# EAGLE board mpg-200-prototype_v2-with-logo (EAGLE 6.2)
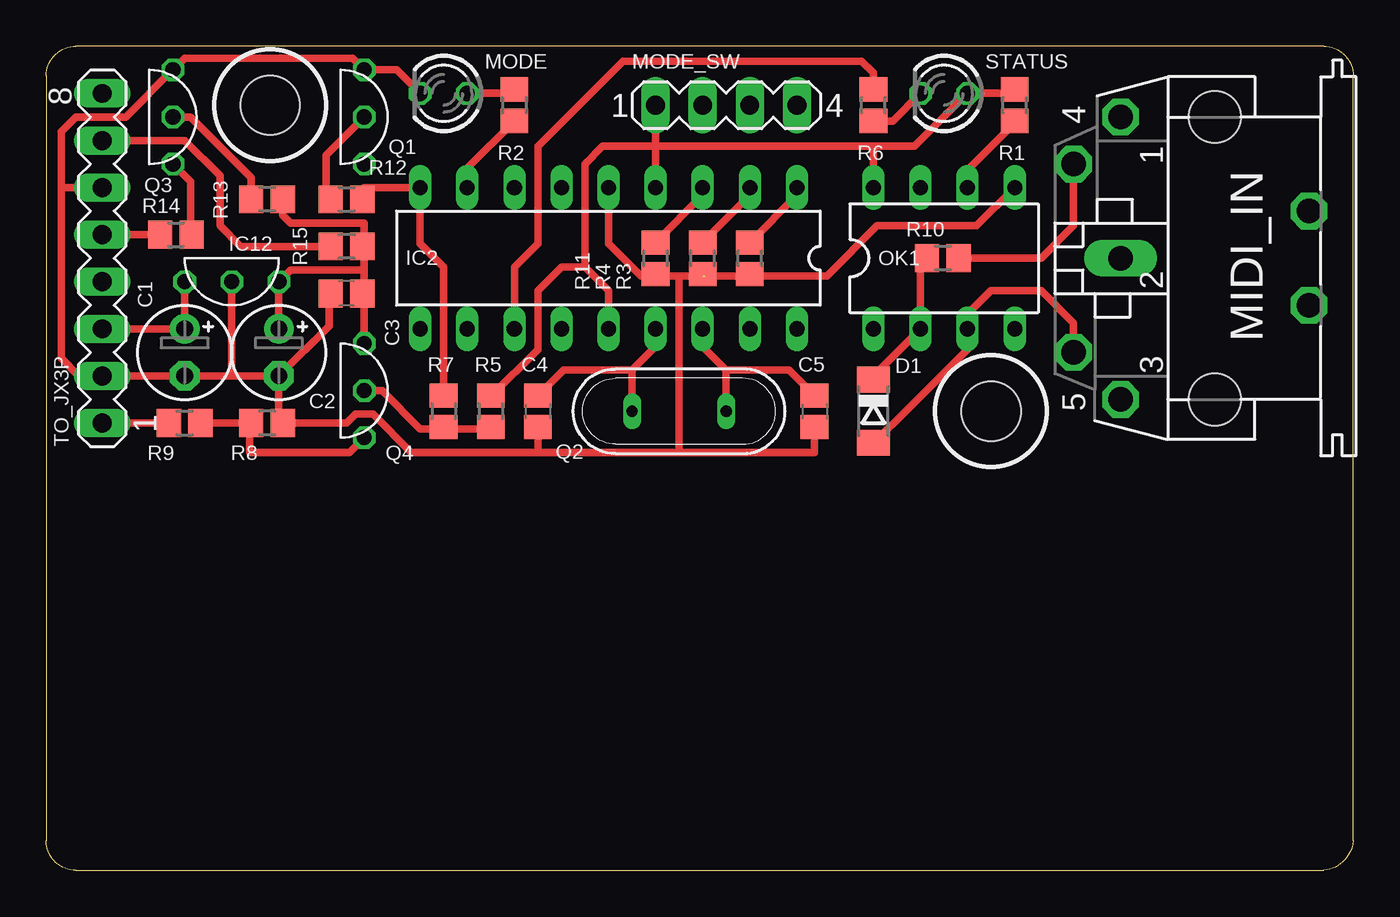
[diagram p0: board, top side]
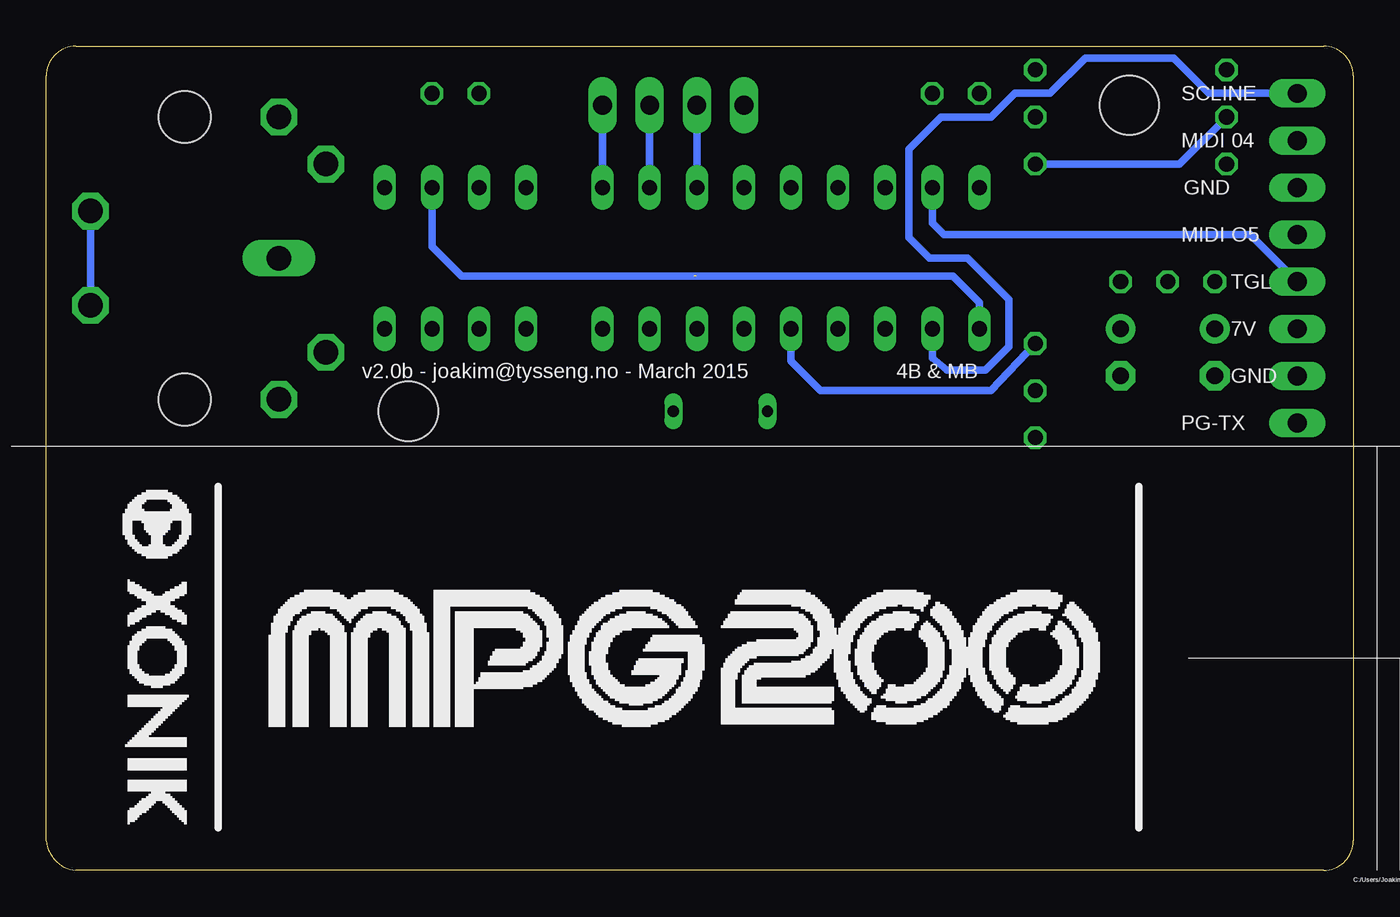
[diagram p1: board, bottom side, seen from below]

Size 70.48 x 44.45 mm. Coordinates in mm from the lower left corner, seen from the top.
Outline: 1.59,0 68.9,0 arc80 70.48,1.59 70.48,42.86 arc90 68.9,44.45 1.59,44.45 arc90 0,42.86 0,1.59 arc90 1.59,0
Copper layers (1*16): Top 0.0356mm / dielectric 1.5011mm / Bottom 0.0356mm
Design rules: minimum track width 6mil, minimum drill 13mil, track to track 6mil, track to pad 6mil, pad to pad 6mil, via to via 6mil, smd to smd 6mil, copper to edge 15mil, drill to drill 6mil, minimum pad ring 7mil, minimum via ring 7mil, stop-mask expansion 3mil, vias tented up to drill 0mil, thermal gap 10mil
Holes 3.2 mm at 50.96,24.77 12.06,41.27

## Footprints (pad centres in the part's own frame; a part is rotated, then mirrored left to right if it is on the bottom)
E2,5-5 = drill 0.9 pad 1.6: + -1.27,0 | drill 0.9 pad 1.6 octagon: - 1.27,0
C0805 = smd 1.3 x 1.5: 1 -0.85,0; 2 0.85,0
SOD80C = smd 1.4 x 1.8: A 1.7,0; C -1.7,0
DIL18 = drill 0.813 long: 1 -10.16,-3.81; 2 -7.62,-3.81; 3 -5.08,-3.81; 4 -2.54,-3.81; 5 0,-3.81; 6 2.54,-3.81; 7 5.08,-3.81; 8 7.62,-3.81; 9 10.16,-3.81; 10 10.16,3.81; 11 7.62,3.81; 12 5.08,3.81; 13 2.54,3.81; 14 0,3.81; 15 -2.54,3.81; 16 -5.08,3.81; 17 -7.62,3.81; 18 -10.16,3.81
TO92 = drill 0.813 octagon: 1 -2.54,0; 2 0,0; 3 2.54,0
MAB5SH = drill 1.321 octagon: 1 7.62,5.08; 3 -7.62,5.08; 4 5.08,7.62; 5 -5.08,7.62; PE -2.54,-5.08; PE@ 2.54,-5.08 | drill 1.321 long: 2 0,5.08 | hole 2.794: 7.62,0; -7.62,0
LED3MM = drill 0.813 octagon: A -1.27,0; K 1.27,0
MA04-1 = drill 1.016 long: 1 -3.81,0; 2 -1.27,0; 3 1.27,0; 4 3.81,0
DIL08 = drill 0.813 long: 1 -3.81,-3.81; 2 -1.27,-3.81; 3 1.27,-3.81; 4 3.81,-3.81; 5 3.81,3.81; 6 1.27,3.81; 7 -1.27,3.81; 8 -3.81,3.81
QS = drill 0.61 long: 1 -2.54,0; 2 2.54,0
R0805 = smd 1.3 x 1.5: 1 -0.85,0; 2 0.85,0
MA08-1 = drill 1.016 long: 1 -8.89,0; 2 -6.35,0; 3 -3.81,0; 4 -1.27,0; 5 1.27,0; 6 3.81,0; 7 6.35,0; 8 8.89,0

## Placement (x,y rotation side)
C1  22uF  [E2,5-5]  7.46,27.94 270 top
C2  10uF  [E2,5-5]  12.54,27.94 270 top
C3  100nF  [C0805]  16.19,31.11 180 top
C4  22pF  [C0805]  26.51,24.77 270 top
C5  22pF  [C0805]  41.43,24.77 270 top
D1  [SOD80C]  44.61,24.77 270 top
IC2  PIC18F1220P  [DIL18]  30.32,33.02 180 top
IC12  7805V  [TO92]  10,31.75 180 top
MIDI_IN  MAB5SH  [MAB5SH]  63.02,33.02 90 top
MODE  [LED3MM]  21.43,41.91 180 top
MODE_SW  [MA04-1]  36.67,41.27 0 top
OK1  6N137  [DIL08]  48.42,33.02 0 top
Q1  2N3904  [TO92]  17.14,40.64 270 top
Q2  20MHz  [QS]  34.13,24.77 180 top
Q3  2N3904  [TO92]  6.83,40.64 270 top
Q4  2N3906  [TO92]  17.14,25.88 270 top
R1  220R  [R0805]  52.23,41.27 90 top
R2  330  [R0805]  25.24,41.27 270 top
R3  1k  [R0805]  37.94,33.02 90 top
R4  1k  [R0805]  35.4,33.02 90 top
R5  22K  [R0805]  23.97,24.77 270 top
R6  330  [R0805]  44.61,41.27 90 top
R7  22K  [R0805]  21.43,24.77 270 top
R8  4.7K  [R0805]  11.91,24.13 180 top
R9  1K  [R0805]  7.46,24.13 0 top
R10  220R  [R0805]  48.36,33.02 180 top
R11  1k  [R0805]  32.86,33.02 90 top
R12  1k  [R0805]  16.19,36.2 0 top
R13  1k  [R0805]  11.91,36.2 180 top
R14  220R  [R0805]  6.99,34.29 0 top
R15  220R  [R0805]  16.19,33.66 180 top
STATUS  [LED3MM]  48.42,41.91 180 top
TO_JX3P  [MA08-1]  3.02,33.02 90 top

## Library data of the parts
C1 C2 = rcl
C3-C5 R1-R15 = resistor
D1 = diode
IC2 = microchip; MF: MICROCHIP; MPN: PIC18F1220-I/P; OC_FARNELL: 9761977; OC_NEWARK: 92C2429
IC12 Q1 Q3 Q4 = joakim
MIDI_IN = con-hirschmann
MODE STATUS = led
MODE_SW = con-lstb; OC_FARNELL: unknown; OC_NEWARK: unknown
OK1 = optocoupler
Q2 = special
TO_JX3P = con-lstb

## Nets
7V_FROM_JX3P: C1.+ IC12.3 TO_JX3P.3
+5V: C2.+ C3.1 IC2.4 IC2.14 IC12.1 MODE_SW.1 OK1.8 Q4.1 R1.2 R5.1 R13.1 R15.1 STATUS.A
GND: C1.- C2.- C3.2 C4.2 C5.2 IC2.5 IC12.2 MODE.K OK1.5 Q1.1 Q3.1 R3.1 R4.1 R8.1 R11.1 TO_JX3P.2 TO_JX3P.6
MIDIIN4: MIDI_IN.4 R10.1
MIDIIN5: D1.A MIDI_IN.5 OK1.3
MIDIOUT4: R15.2 TO_JX3P.7
MIDIOUT5: R14.1 TO_JX3P.5
MIDIRX: IC2.10 OK1.6 R1.1
N$1: R6.1 STATUS.K
N$2: Q4.2 R5.2 R7.2
N$3: MODE.A R2.1
N$4: Q1.2 R12.1
N$5: D1.C OK1.2 R10.2
N$6: Q4.3 R8.2 R9.2
N$7: Q1.3 Q3.2 R13.2
N$8: Q3.3 R14.2
N$9: R9.1 TO_JX3P.1
PE: MIDI_IN.PE MIDI_IN.PE@
SCANLINE: IC2.11 TO_JX3P.8
STATUSLED: IC2.12 R6.2
SW1: IC2.1 MODE_SW.4 R3.2
SW2: IC2.2 MODE_SW.3 R4.2
SW3: IC2.3 MODE_SW.2 R11.2
TOGGLE: IC2.8 R2.2 TO_JX3P.4
TX: IC2.9 R7.1 R12.2
XTAL1: C5.1 IC2.16 Q2.1
XTAL2: C4.1 IC2.15 Q2.2

## Tracks (layer width: path | path; a pad name or v marks a point on that pad's centre or on a via)
7V_FROM_JX3P
  Top 0.406: IC12.3 C1.+ TO_JX3P.3
+5V
  Top 0.406: IC2.14 30.32,31.27 29.05,32.54 | 29.05,32.54 29.05,38.1 30,39.05 32.86,39.05 | 17.14,32.38 17.14,33.97 17.04,34.08 R15.1 17.14,33.76 17.14,34.92 13.18,34.92 12.76,35.34 R13.1 | 17.14,32.38 17.14,31.85 C3.1 17.04,31.54 17.14,31.43 Q4.1 | 17.14,32.38 13.18,32.38 IC12.1 C2.+ | R5.1 24.03,25.61 26.51,28.1 26.51,31.27 27.78,32.54 29.05,32.54 | R1.2 52.23,41.91 STATUS.A 46.83,39.05 44.61,39.05 | MODE_SW.1 32.86,39.05 | 32.86,39.05 44.61,39.05 | OK1.8 44.61,39.05 | 32.86,39.05 IC2.4
  Bottom 0.406: Q4.1 19.53,25.88 28.73,25.88 30.32,27.46 IC2.14
GND  (1 unrouted)
  Top 0.406: C2.- 12.54,24.13 R8.1 16.19,24.13 16.67,24.61 17.62,24.61 19.68,22.54 26.51,22.54 | IC2.5 30.32,33.81 32.07,32.07 34.13,32.07 | 26.51,22.54 34.29,22.54 | 34.29,22.54 41.43,22.54 C5.2 | 35.56,32.07 32.79,32.04 R11.1 | 35.43,32.07 34.13,32.07 | 34.13,32.07 34.13,22.7 34.29,22.54 | C2.- 15.24,29.37 15.24,31.65 C3.2 | IC12.2 10,26.67 | 10,26.67 C1.- TO_JX3P.2 1.75,26.67 0.79,27.62 0.79,36.83 | 10,26.67 C2.- | C4.2 26.51,22.54 | 0.79,36.83 0.79,39.85 1.59,40.64 4.29,40.64 Q3.1 7.46,43.81 16.51,43.81 Q1.1 18.89,43.18 MODE.K | TO_JX3P.6 0.79,36.83 | 35.43,32.07 37.97,32.07 | 37.97,32.07 42.1,32.07 44.8,34.77 50.16,34.77 OK1.5 | 35.43,32.07 R4.1 | R3.1 38,32.04 37.97,32.07
MIDIIN4
  Top 0.406: MIDI_IN.4 55.4,34.77 53.66,33.02 R10.1
MIDIIN5
  Top 0.406: D1.A 44.72,23.18 45.88,24.29 49.69,28.1 OK1.3 49.69,30 50.96,31.27 53.66,31.27 55.4,29.53 MIDI_IN.5
MIDIOUT4
  Top 0.406: R15.2 10.48,33.66 9.37,34.77 9.37,37.47 7.46,39.37 TO_JX3P.7
MIDIOUT5
  Top 0.406: TO_JX3P.5 R14.1
MIDIRX
  Top 0.406: R1.1 52.23,40.32 49.69,37.78 OK1.6
  Bottom 0.406: IC2.10 20.16,30.64 21.59,32.07 48.1,32.07 49.69,33.66 OK1.6
N$1
  Top 0.406: R6.1 45.66,40.42 STATUS.K
N$2
  Top 0.406: Q4.2 18.1,25.88 20.16,23.81 21.33,23.81 R7.2 21.43,23.81 23.87,23.81 R5.2
N$3
  Top 0.406: MODE.A 25.03,41.91 R2.1
N$4
  Top 0.406: Q1.2 15.08,38.58 15.08,36.46 R12.1
N$5
  Top 0.406: 47.72,33.02 R10.2 | D1.C 44.72,26.78 OK1.2 47.15,32.7 47.34,33.02 R10.2 | 47.45,33.08 R10.2
N$6
  Top 0.406: Q4.3 16.35,22.54 10.95,22.54 10.95,24.03 R8.2 R9.2
N$7
  Top 0.406: Q3.2 7.78,40.64 11.06,37.36 R13.2
  Bottom 0.406: Q1.3 9.37,38.1 Q3.2
N$8
  Top 0.406: Q3.3 7.78,37.15 7.78,33.87 R14.2
N$9
  Top 0.406: TO_JX3P.1 R9.1
PE
  Bottom 0.406: MIDI_IN.PE@ MIDI_IN.PE
SCANLINE
  Bottom 0.406: TO_JX3P.8 7.78,41.91 9.68,43.81 14.45,43.81 16.35,41.91 18.26,41.91 19.53,40.64 22.23,40.64 23.97,38.89 23.97,34.13 22.86,33.02 20.8,33.02 18.57,30.8 18.57,28.26 19.84,26.99 21.91,26.99 22.7,27.62 IC2.11
STATUSLED
  Top 0.406: IC2.12 25.24,32.54 26.51,33.81 26.51,39.05 31.11,43.66 43.97,43.66 44.61,43.02 R6.2
SW1
  Top 0.406: 38.07,33.81 R3.2 40.48,36.41 IC2.1
  Bottom 0.406: MODE_SW.4 IC2.1
SW2
  Top 0.406: IC2.2 37.94,36.41 R4.2
  Bottom 0.406: MODE_SW.3 IC2.2
SW3
  Top 0.406: IC2.3 35.4,36.41 R11.2
  Bottom 0.406: MODE_SW.2 IC2.3
TOGGLE
  Top 0.406: IC2.8 22.7,37.88 R2.2
  Bottom 0.406: TO_JX3P.4 5.56,34.29 22.07,34.29 22.7,34.92 IC2.8
TX
  Top 0.406: R12.2 17.04,36.73 17.14,36.83 IC2.9 20.16,33.81 21.43,32.54 R7.1
XTAL1
  Top 0.406: IC2.16 35.4,28.26 36.67,26.99 | 36.67,26.99 40.06,26.99 C5.1 | 36.67,26.99 Q2.1
XTAL2
  Top 0.406: IC2.15 32.86,28.26 31.59,26.99 | 31.59,26.99 27.88,26.99 C4.1 | 31.59,26.99 Q2.2

## Text on the board
bNames: SCLINE | MIDI 04 | GND | MIDI O5 | TGL | 7V | 4B & MB | v2.0b - joakim@tysseng.no - March 2015 | GND | PG-TX | C:/Users/Joakim/Documents/Elektronikk og synth/Logoer/mpg-200-45mm-mirrored.bmp | C:/Users/Joakim/Google Drive/elektro/eagle projects/Logos/xonik-logo-monocrome-18 mm 200 dpi.bmp